# Altium PCB ElectroSketch(a).PcbDoc
Units mil, origin at the board's own origin, x right, y up, seen from the top; angles counter-clockwise.
Board outline 3937.01 x 2440.95 mil, 2 copper layers (Top Layer, Bottom Layer), stack 65.792 mil thick; 9 components, 18 nets, 88 pads, 21 vias.
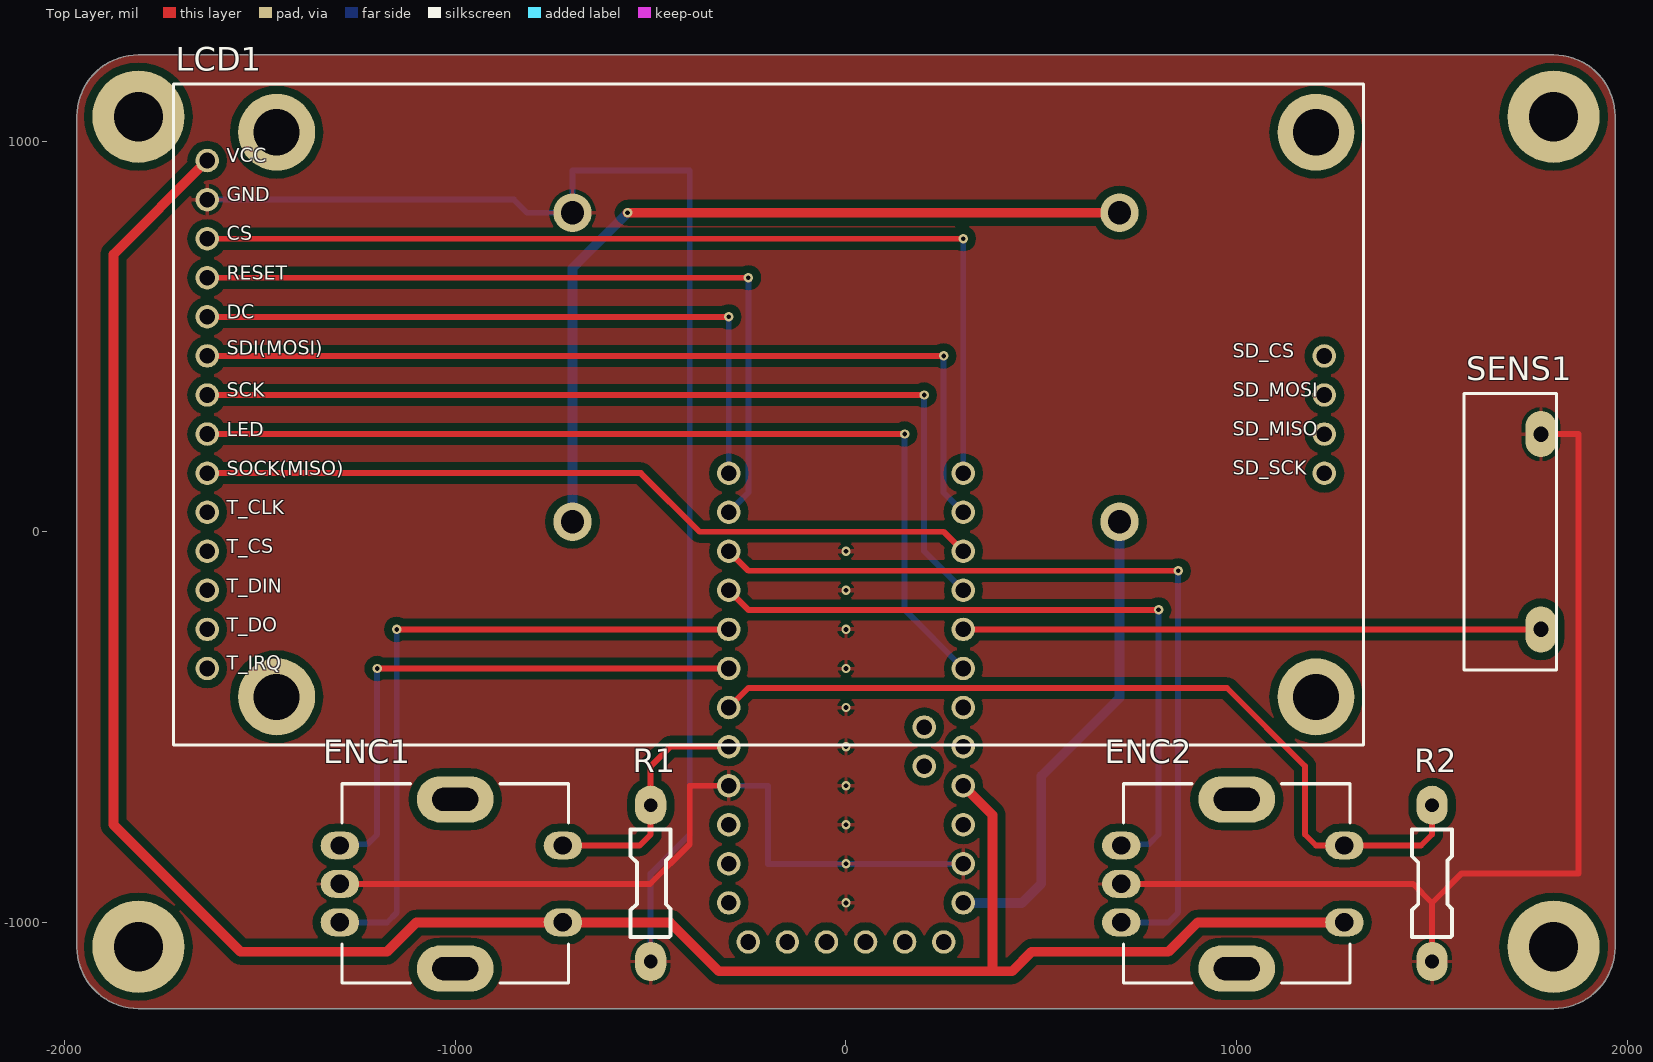
[diagram p0: Top Layer view]
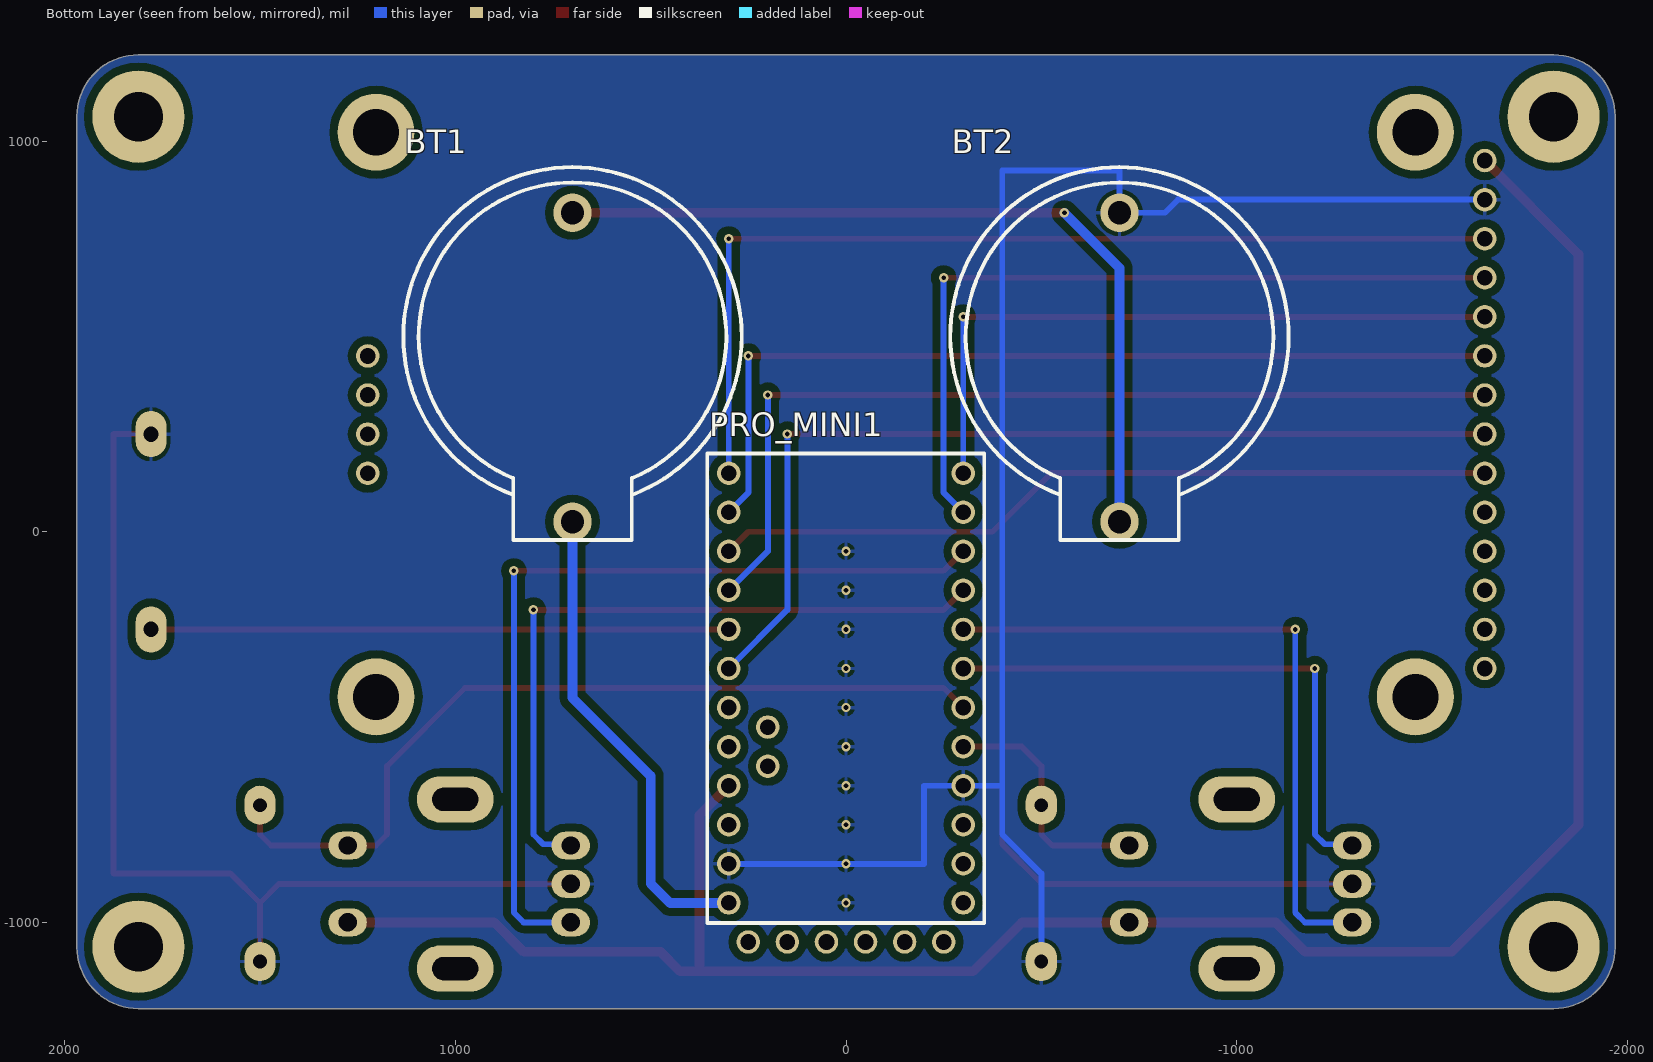
[diagram p1: Bottom Layer view, seen from below]

## Layer stack, top to bottom
Top Solder: solder mask 0.4, Solder Resist, Dk 3.5
Top Layer: signal copper 1.4
Dielectric 1: dielectric 62.9921, FR-4, Dk 4.8
Bottom Layer: signal copper 1.4
Bottom Solder: solder mask 0.4, Solder Resist, Dk 3.5

## Board outline
-1968.5,-1062.99 -1968.5,1062.99 cw(c-1811.02,1062.99) -1811.02,1220.47 1811.02,1220.47 cw(c1811.02,1062.99) 1968.5,1062.99 1968.5,-1062.99 cw(c1811.02,-1062.99) 1811.02,-1220.47 -1811.02,-1220.47 cw(c-1811.02,-1062.99)

## Design rules (kind name [scope] priority, off if disabled: settings)
Clearance Poly_GND [inPolygon vs not innet (gnd)] p1: gap=20
Clearance [All] p2: gap=8
HoleSize [All] p1 off: absolutevalues=TRUE maxlimit=100 minlimit=1 maxpercent=80.000 minpercent=20.000
HoleSize Testpoint [All] p2 off: absolutevalues=TRUE maxlimit=100 minlimit=1 maxpercent=80.000 minpercent=20.000
HoleSize TestPointUsage [All] p3 off: absolutevalues=TRUE maxlimit=100 minlimit=1 maxpercent=80.000 minpercent=20.000
HoleToHoleClearance [All] p1 off: gap=10 allowstackedmicrovias=TRUE
LayerPairs [All] p1 off: enforce=TRUE
MinimumSolderMaskSliver [All] p1 off: minsoldermaskwidth=10
MinimumSolderMaskSliver SilkscreenOverComponentPads [All] p2 off: minsoldermaskwidth=10
NetAntennae [All] p1 off: netantennaetolerance=0
PolygonConnect [All] p1: connectstyle=Relief reliefconductorwidth=10 reliefentries=4 polygonreliefangle="90 Angle" airgapwidth=10
RoomDefinition ElectroSketch [InComponentClass('ElectroSketch')] p1: confinementstyle=ConfineIn formatcopy=TRUE lockcomponents=FALSE outline -5515.75,-3515.75 -2366.14,-3515.75 -2366.14,-1547.24 -5515.75,-1547.24
RoutingVias [All] p1: holewidth=12 width=24 viastyle="Through Hole" minholewidth=12 minwidth=24 maxholewidth=28 maxwidth=50
SilkToSilkClearance [All] p1 off: silktosilkclearance=10
SilkToSolderMaskClearance [IsPad] p1 off: minsilkscreentomaskgap=10 clearancetoexposedcopper=TRUE
SolderMaskExpansion [All] p1: expansion=4
Width Standard [All] p1: maxlimit=25 minlimit=8 preferedwidth=8
Width Power [inNet('VIN')] p2: maxlimit=100 minlimit=8 preferedwidth=25
23 further rules are at their usual default settings.

## Components (designator, comment, footprint, x,y, rotation, side; value= is the part's Value field where it differs from the comment)
BT1 "CR2032" "CR2032 HOLDER" 700,500 r270 bottom
BT2 "CR2032" "CR2032 HOLDER" -700,500 r270 bottom
ENC1 "EC11 ENCODER" "EC11 ENCODER" -1000,-900 r180 top
ENC2 "EC11 ENCODER" "EC11 ENCODER" 1000,-900 r180 top
LCD1 "2.4 TFT 240X320" "2.4 TFT LCD" -260,275 r0 top
PRO_MINI1 "reduced footprint pro mini" PROMINI 0,-400 r90 bottom
R1 "RESISTOR 1/4W 10k" "RESISTOR 0.400\"" -500,-900 r90 top
R2 "RESISTOR 1/4W 10k" "RESISTOR 0.400\"" 1500,-900 r90 top
SENS1 "SHAKE SENSOR" "SHAKE SENSOR" 1700,0 r270 top

## Footprints (in the part's own frame and the unit in brackets; to place one, negate y for a bottom-side part, rotate by r counter-clockwise, add the part's x,y. Pads: shape width x height; smd on the part's side, far side on the other; paste and mask are expansions set on the pad)
"2.4 TFT LCD" [mil] "2.4\" TFT LCD (AND TOUCH SCREEN)"
  round 60 hole 40: 1(-1375,675) 2(-1375,575) 3(-1375,475) 4(-1375,375) 5(-1375,275) 6(-1375,175) 7(-1375,75) 8(-1375,-25) 9(-1375,-125) 10(-1375,-225) 11(-1375,-325) 12(-1375,-425) 13(-1375,-525) 14(-1375,-625) 15(1484.21,174.93) 16(1484.21,74.93) 17(1484.21,-25.07) 18(1484.21,-125.07)
  round 196.85 hole 118.11 unplated: MOUNT(-1197.29,-697.56) MOUNT(-1197.29,747.43) MOUNT(1462.71,-697.56) MOUNT(1462.71,747.43)
  silkscreen extent -1461,-821 1584,870, body extent -1461,-821 1584,870, height 421
"CR2032 HOLDER" [mm]
  round 2.5 hole 1.5: 1(12.05,0) 2(-8.035,0)
  silkscreen extent -11,-11 13.25,11, body extent -11.15,-11.15 13.15,11.15, height 8.5
"EC11 ENCODER" [mm] "EC11 ROTARY ENCODER"
  oval 2.5x1.8 hole 1.2: 1(7.5,-2.461) 2(7.5,0.039) 3(7.5,2.539) 4(-7,2.539) 5(-7,-2.461)
  oval 5x3 hole 1.5 slot 3 at 0 deg: MOUNT(0,5.539) MOUNT(0,-5.461)
  silkscreen extent -7.37,-6.48 7.37,6.48, body extent -7.4,-6.55 7.73,6.55, height 31.6
PROMINI [mil]
  round 60 hole 40: 1(-550,-300) 2(-450,-300) 3(-350,-300) 4(-250,-300) 5(-150,-300) 6(-50,-300) 7(50,-300) 8(150,-300) 9(250,-300) 10(350,-300) 11(450,-300) 12(550,-300) 13(550,300) 14(450,300) 15(350,300) 16(250,300) 17(150,300) 18(50,300) 19(-50,300) 20(-150,300) 21(-250,300) 22(-350,300) 23(-450,300) 24(-550,300) 25(-650,-250) 26(-650,-150) 27(-650,-50) 28(-650,50) 29(-650,150) 30(-650,250) 31(-200,200) 32(-100,200)
  silkscreen extent -602,-354 600,355, body extent -700,-350 600,350, height 239
"RESISTOR 0.400\"" [mil]
  oval 100x80 hole 35: 1(-200,0) 2(200,0)
  silkscreen extent -137,-51 138,51, body extent -211,-51 211,51, height 106
"SHAKE SENSOR" [mm]
  oval 3x2 hole 1 unplated: 1(-6.35,2) 2(6.35,2)
  silkscreen extent -9,-3 9,3, body extent -9,-3 9,3, height 6

## Part data
BT1 BT2: library part Battery, "Multicell Battery"
ENC1 ENC2: "EC11 ROTARY ENCODER WITH PUSH BUTTON"
PRO_MINI1: library part "ARDUINO PRO MINI", "ARDUINO PRO MINI"
R1 R2: library part Res2, "RESISTOR 1/4W AXIAL 0.400\""

## Free pads (board coordinates)
  round 10 on Mech16: 1(5082.1,-3582.94) 1(5082.1,-3582.94) 1(5082.62,-3660.05) 1(5082.62,-3660.05) 1(5269.4,-3515.17) 1(5269.4,-3515.17)
  round 236.22 hole 125.98: MOUNT(-1811.02,-1062.4) MOUNT(-1811.02,1062.4) MOUNT(1811.02,-1062.4) MOUNT(1811.02,1062.4)

## Via types
v1: diameter 24, hole 12, Top Layer to Bottom Layer, 21 vias

## Nets (pads, with @x,y where several pads share a name; then routed paths per layer and width w, separated by ;. In a path a pad name is that pad's centre, name@x,y a point inside that pad or via, vN(x,y) a via of type N, cw(c..) or ccw(c..) an arc to the next point about the centre after c; other vN are vias at no path point)
CS: LCD1.3 PRO_MINI1.13 | length 2535
  Top Layer w15: LCD1.3 v1(300,750)
  Bottom Layer w15: PRO_MINI1.13 300,725 v1(300,750)
DC/RS: LCD1.5 PRO_MINI1.12 | length 1735
  Top Layer w15: LCD1.5 v1(-300,550)
  Bottom Layer w15: PRO_MINI1.12 v1(-300,550)
EN1_A: ENC1.1 PRO_MINI1.7 | length 1431.9
  Top Layer w15: v1(-1200,-350) PRO_MINI1.7
  Bottom Layer w15: ENC1.1 -1292.17,-800 -1225,-800 -1200,-775 v1(-1200,-350)
EN1_B: ENC1.3 PRO_MINI1.8 | length 1730.6
  Top Layer w15: v1(-1150,-250) -1125,-250 PRO_MINI1.8
  Bottom Layer w15: ENC1.3 -1225.03,-999.97 ; -1225,-1000 -1175,-1000 -1150,-975 v1(-1150,-250)
EN2_A: ENC2.1 PRO_MINI1.9 | length 1798.2
  Top Layer w15: PRO_MINI1.9 -250,-200 v1(800,-200)
  Bottom Layer w15: ENC2.1@707.83,-800 775,-800 800,-775 v1(800,-200)
EN2_B: ENC2.3 PRO_MINI1.10 | length 2201.3
  Top Layer w15: PRO_MINI1.10 -250,-100 v1(850,-100)
  Bottom Layer w15: ENC2.3 825.03,-999.97 850,-975 v1(850,-100)
GND: BT2.2 ENC1.2 ENC2.2 LCD1.2 PRO_MINI1.4 PRO_MINI1.23 R1.1 R2.1 SENS1.1 | length 8104
  Top Layer w15: ENC1.2 -501.54,-901.54 -400,-800 -400,-650 PRO_MINI1.4 ; ENC2.2 1451.54,-901.54 1500,-950 ; R2.1 1500,-950 ; SENS1.1 1875,250 1875,-875 1575,-875 1500,-950
  Bottom Layer w15: LCD1.2 -850,850 -816.34,816.34 BT2.2 -700,925 -400,925 -400,-650 ; R1.1 -500,-875 -400,-775 -400,-650 ; PRO_MINI1.23 -200,-850 -200,-650 PRO_MINI1.4 -400,-650
  other v1: 0,-950 0,-850 0,-750 0,-650 0,-550 0,-450 0,-350 0,-250 0,-150 0,-50
LCD_RESET: LCD1.4 PRO_MINI1.11 | length 2005.7
  Top Layer w15: LCD1.4 v1(-250,650)
  Bottom Layer w15: PRO_MINI1.11 -250,100 v1(-250,650)
LEDPWM: LCD1.8 PRO_MINI1.18 | length 2447.1
  Top Layer w15: LCD1.8 v1(150,250)
  Bottom Layer w15: v1(150,250) 150,-200 PRO_MINI1.18
MISO: LCD1.9 PRO_MINI1.15 | length 2017.8
  Top Layer w15: LCD1.9 -525,150 -375,0 250,0 PRO_MINI1.15
MOSI: LCD1.6 PRO_MINI1.14 | length 2305.7
  Top Layer w15: LCD1.6 v1(250,450)
  Bottom Layer w15: v1(250,450) 250,425 250,100 PRO_MINI1.14
NetBT1_2: BT1.2 BT2.1 | length 2107.8
  Top Layer w25: v1(-559,816.34) BT1.2
  Bottom Layer w25: BT2.1 -700,675 v1@-559,816
SCK: LCD1.7 PRO_MINI1.16 | length 2376.4
  Top Layer w15: LCD1.7 v1(200,350)
  Bottom Layer w15: v1(200,350) 200,-50 PRO_MINI1.16
SHAKE: PRO_MINI1.17 SENS1.2 | length 1478.7
  Top Layer w15: PRO_MINI1.17 SENS1.2
SW1: ENC1.5 PRO_MINI1.5 R1.2 | length 631.8
  Top Layer w15: ENC1.5 -528.11,-803.11 -500,-775 R1.2 -500,-600 -450,-550 PRO_MINI1.5
SW2: ENC2.5 PRO_MINI1.6 R2.2 | length 2176.8
  Top Layer w15: PRO_MINI1.6 -250,-400 975,-400 1175,-600 1175,-775 1203.11,-803.11 ENC2.5 1471.89,-803.11 1500,-775 R2.2
VBAT: BT1.1 PRO_MINI1.24 | length 1229.1
  Bottom Layer w25: PRO_MINI1.24 450,-950 500,-900 500,-625 700,-425 BT1.1
VCC: ENC1.4 ENC2.4 LCD1.1 PRO_MINI1.21 | length 5725.3
  Top Layer w25: LCD1.1 -1875,710 -1875,-750 -1550,-1075 -1175,-1075 -1099.97,-999.97 ENC1.4 -450.03,-999.97 -325,-1125 375,-1125 ; PRO_MINI1.21 375,-725 375,-1125 ; ENC2.4 900.03,-999.97 825,-1075 475,-1075 425,-1125 375,-1125
pads on no net: ENC1.MOUNT ENC2.MOUNT LCD1.10 LCD1.11 LCD1.12 LCD1.13 LCD1.14 LCD1.15 LCD1.16 LCD1.17 LCD1.18 LCD1.MOUNT PRO_MINI1.1 PRO_MINI1.2 PRO_MINI1.3 PRO_MINI1.19 PRO_MINI1.20 PRO_MINI1.22 PRO_MINI1.25 PRO_MINI1.26 PRO_MINI1.27 PRO_MINI1.28 PRO_MINI1.29 PRO_MINI1.30 PRO_MINI1.31 PRO_MINI1.32

## Polygon pours and split planes (outlines as drawn)
GND on Top Layer "TOP GND" (solid, remove dead copper, pour order 0): -1968.5,-1062.99 -1968.5,1062.99 cw(c-1811.02,1062.99) -1811.02,1220.47 1811.02,1220.47 cw(c1811.02,1062.99) 1968.5,1062.99 1968.5,-1062.99 cw(c1811.02,-1062.99) 1811.02,-1220.47 -1811.02,-1220.47 cw(c-1811.02,-1062.99)
GND on Bottom Layer "TOP GND" (solid, remove dead copper, pour order 1): -1968.5,-1062.99 -1968.5,1062.99 cw(c-1811.02,1062.99) -1811.02,1220.47 1811.02,1220.47 cw(c1811.02,1062.99) 1968.5,1062.99 1968.5,-1062.99 cw(c1811.02,-1062.99) 1811.02,-1220.47 -1811.02,-1220.47 cw(c-1811.02,-1062.99)

## Silkscreen, mask and mechanical layers (free items; w line width, h text height)
Mechanical 1:
  the board outline again, w3.94
Mechanical 32:
  drawing of 655 lines, arcs and shapes, not listed
  text "1" at -4645.67,3996.06 h100
  text "2" at -1377.95,3996.06 h100
  text "3" at 1574.8,3996.06 h100
  text "4" at 4389.76,3996.06 h100
  text "A" at -5767.72,3090.55 h100
  text "A" at 5728.35,3090.55 h100
  text "B" at -5787.4,1003.94 h100
  text "B" at 5708.66,1003.94 h100
  text "C" at -5767.72,-1122.05 h100
  text "C" at 5728.35,-1122.05 h100
  text "D" at -5767.72,-3248.03 h100
  text "D" at 5728.35,-3248.03 h100
  text "LOW COST LABS" at 2696.85,-3307.09 h100
  text "TITLE: Electro-Sketch" at 1377.95,-3523.62 h100
  text "ludzinc.blogspot.com.au" at 3725,-3550 h100
  text "SIZE: A4" at 1377.95,-3700.79 h100
  text "Number: LCL_018" at 2204.72,-3700.79 h100
  text "Revison 1.00" at 2992.13,-3700.79 h100
  text "www.lowcostlabs.com.au" at 3740.16,-3700.79 h100
  text "DATE:" at 1377.95,-3818.9 h100
  text ".Print_Date" at 1614.17,-3818.9 h100
  text "SHEET 1 of 1" at 2992.13,-3818.9 h100
  text "FILE:" at 1377.95,-3917.32 h100
  text ".Pcb_File_Name" at 1614.17,-3917.32 h100
  text "S" at -5649.61,-3937.01 h100
  text "1" at -4645.67,-4055.12 h100
  text "2" at -1377.95,-4055.12 h100
  text "3" at 1574.8,-4055.12 h100
  text "4" at 4389.76,-4055.12 h100

## Text inside footprints (layer, text, board x,y; h text height)
LCD1: Top Overlay "SD_SCK" at 990,134.06 h60; Top Overlay "SD_MISO" at 990,234.06 h60; Top Overlay "SD_MOSI" at 990,334.06 h60; Top Overlay "SD_CS" at 990,434.06 h60; Top Overlay "VCC" at -1585,934.13 h60; Top Overlay "GND" at -1585,834.01 h60; Top Overlay "CS" at -1585,733.89 h60; Top Overlay "RESET" at -1585,633.77 h60; Top Overlay "DC" at -1585,533.66 h60; Top Overlay "SDI(MOSI)" at -1585,440.87 h60; Top Overlay "SCK" at -1585,333.42 h60; Top Overlay "LED" at -1585,232.86 h60; Top Overlay "SOCK(MISO)" at -1585,133.19 h60; Top Overlay "T_CLK" at -1585,33.07 h60; Top Overlay "T_CS" at -1585,-67.05 h60; Top Overlay "T_DIN" at -1585,-167.17 h60; Top Overlay "T_DO" at -1585,-267.28 h60; Top Overlay "T_IRQ" at -1585,-364.35 h60